# EAGLE board ponte_h (EAGLE 9.7.0)

Size 151.92 x 61.78 mm. Coordinates in mm from the lower left corner, seen from the top.
Outline: 0,0 151.92,0 151.92,61.78 0,61.78 0,0
Copper layers (1*16): Top 0.035mm / dielectric 1.5mm / Bottom 0.035mm
Design rules "default": minimum track width 6mil, minimum drill 0.35mm, track to track 6mil, track to pad 6mil, pad to pad 6mil, via to via 6mil, smd to smd 6mil, copper to edge 40mil, drill to drill 6mil, minimum pad ring 10mil, minimum via ring 8mil, stop-mask expansion 4mil, vias tented up to drill 0mil, thermal gap 10mil

## Footprints (pad centres in the part's own frame; a part is rotated, then mirrored left to right if it is on the bottom)
BATTERY-GENERIC = drill 1.118 pad 3.15 octagon: + 2.54,0; - -2.54,0
MOTOR = drill 1.118 pad 3.15 octagon: + 2.54,0; - -2.54,0
SWITCH-SPDT-PTH-8.5X3.7MM = drill 1.016 pad 1.88: 1 -2.54,0; 2 0,0; 3 2.54,0
DIP762W53P254L1969H508Q16B = drill 0.743 pad 1.343: 1 -3.81,8.89; 2 -3.81,6.35; 3 -3.81,3.81; 4 -3.81,1.27; 5 -3.81,-1.27; 6 -3.81,-3.81; 7 -3.81,-6.35; 8 -3.81,-8.89; 9 3.81,-8.89; 10 3.81,-6.35; 11 3.81,-3.81; 12 3.81,-1.27; 13 3.81,1.27; 14 3.81,3.81; 15 3.81,6.35; 16 3.81,8.89

## Placement (x,y rotation side)
BAT1  9V  [BATTERY-GENERIC]  8.26,41.61 0 top
M1  MOTOR_HDR  [MOTOR]  79.72,53.28 0 top
M2  MOTOR_HDR  [MOTOR]  104.06,53.52 0 top
S1  TOGGLE  [SWITCH-SPDT-PTH-8.5X3.7MM]  50.54,45.98 0 top
S2  TOGGLE  [SWITCH-SPDT-PTH-8.5X3.7MM]  59.36,45.76 0 top
S3  TOGGLE  [SWITCH-SPDT-PTH-8.5X3.7MM]  68.27,45.89 0 top
S4  TOGGLE  [SWITCH-SPDT-PTH-8.5X3.7MM]  126.78,46.68 0 top
S5  TOGGLE  [SWITCH-SPDT-PTH-8.5X3.7MM]  135.75,46.61 0 top
S6  TOGGLE  [SWITCH-SPDT-PTH-8.5X3.7MM]  144.51,46.58 0 top
U1  L293E  [DIP762W53P254L1969H508Q16B]  102.45,7.66 90 top

## Library data of the parts
BAT1 M1 M2 S1-S6 U1 = Tinkercad

## Nets
BAT1+: BAT1.+ S1.1 S2.1 S3.1 S4.1 S5.1 S6.1 U1.8 U1.16
BAT1-: BAT1.- S1.3 S2.3 S3.3 S4.3 S5.3 S6.3 U1.4 U1.5 U1.12 U1.13
M1_+: M1.+ U1.6
M1_-: M1.- U1.3
M2_+: M2.+ U1.11
M2_-: M2.- U1.14
U1_1-2EN: S1.2 U1.1
U1_1A: S2.2 U1.2
U1_2A: S3.2 U1.7
U1_3-4EN: S4.2 U1.9
U1_3A: S5.2 U1.10
U1_4A: S6.2 U1.15

## Tracks (layer width: path | path; a pad name or v marks a point on that pad's centre or on a via)
BAT1+  (8 unrouted)
BAT1-  (10 unrouted)
M1_+  (1 unrouted)
M1_-  (1 unrouted)
M2_+  (1 unrouted)
M2_-  (1 unrouted)
U1_1-2EN  (1 unrouted)
U1_1A  (1 unrouted)
U1_2A  (1 unrouted)
U1_3-4EN  (1 unrouted)
U1_3A  (1 unrouted)
U1_4A  (1 unrouted)